# Altium PCB Recovery.PcbDoc (part 3 of 3)
Units mil, origin at the board's own origin, x right, y up, seen from the top; angles counter-clockwise.
Board outline 11025 x 3525 mil, 2 copper layers (Top Layer, Bottom Layer), stack 65.792 mil thick; 249 components, 149 nets, 729 pads, 156 vias.
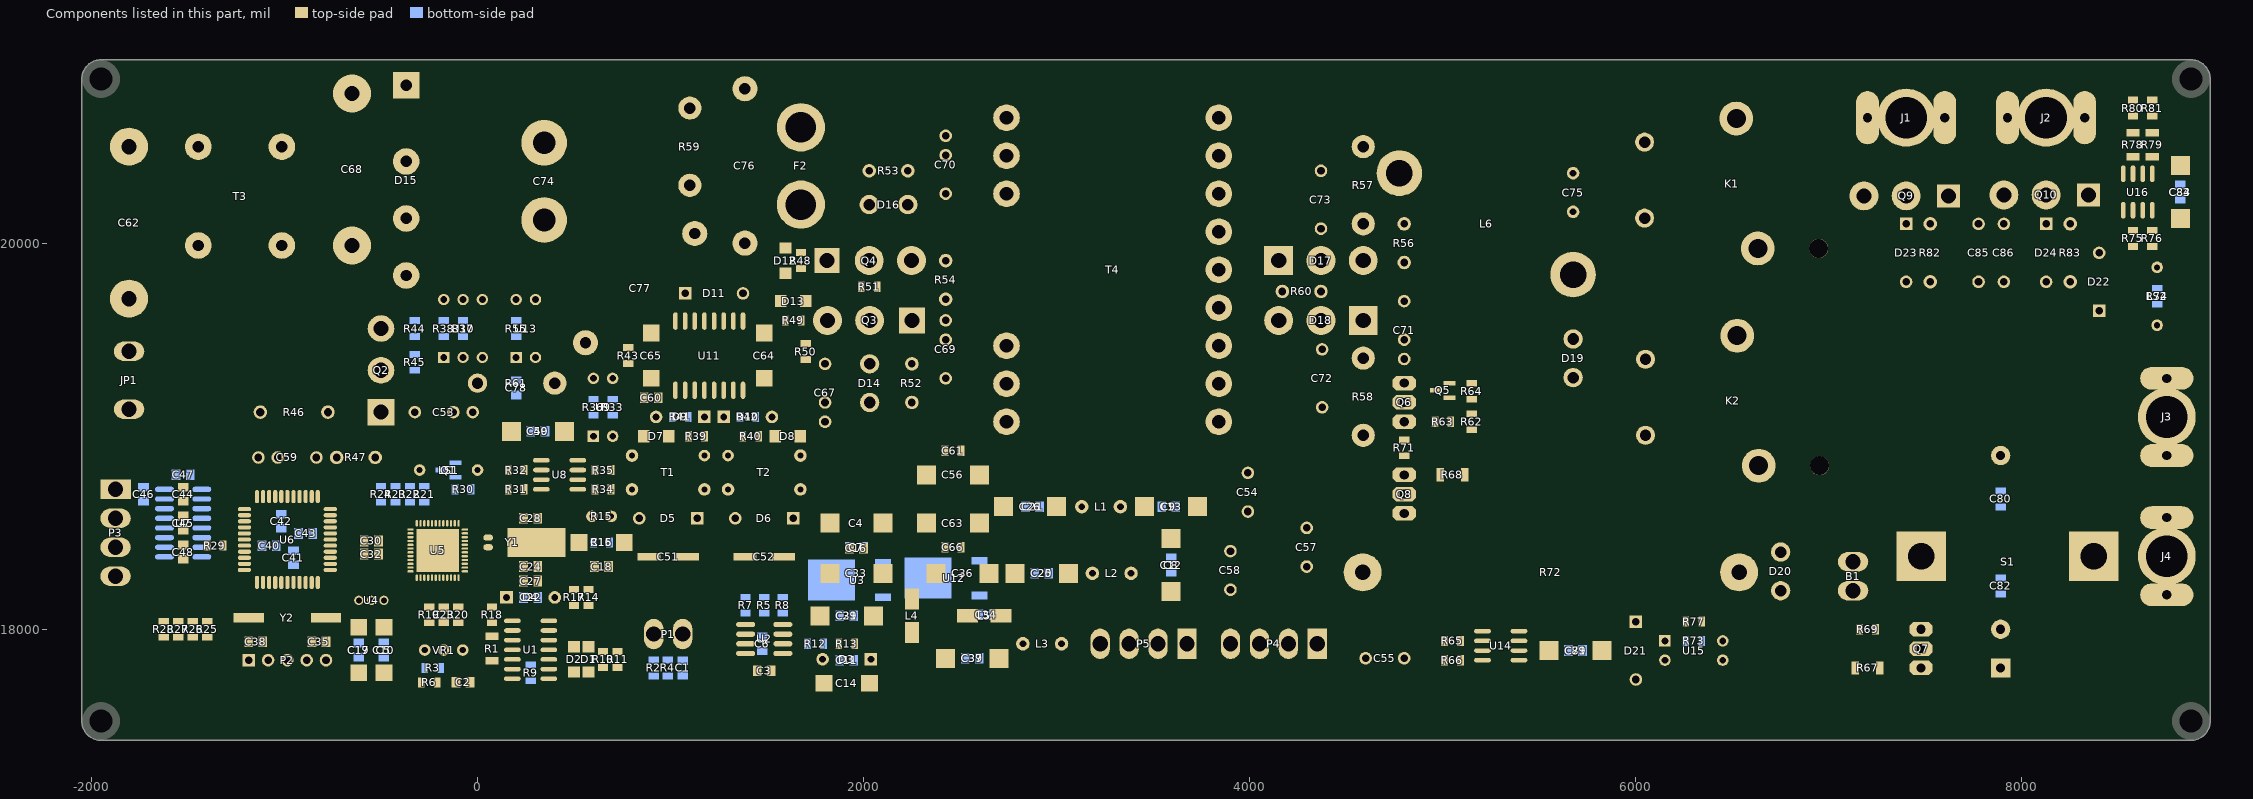
[diagram p3: the components of this part, seen from the top]

## Keep-outs
Keep-Out Layer:
  circle w5: c5446.85,18700 r125.98
  circle w5: c6830.71,17900 r125.98
  circle w5: c5446.85,19175 r125.98
  circle w5: c8126.69,19498.9 r147.64
  circle w5: c7401.69,19488.9 r147.64
  circle w5: c4368.9,18843.31 r125.98
  circle w5: c4368.9,20666.69 r125.98
  circle w5: c-1329.92,19341.54 r125.98
  circle w5: c2028.9,20666.69 r147.64
  circle w5: c2031.1,18843.31 r125.98
  lines w5: -2050,17525 ccw(c-1950,17525) -1950,17425 8875,17425 ccw(c8875,17525) 8975,17525 8975,20850 ccw(c8875,20850) 8875,20950 -1950,20950 ccw(c-1950,20850) -2050,20850 -2050,17525

## Other copper
Top Layer:
  region net GND: 2925,17555 2935,17545 3150,17545 3165,17560 3165,17610 3155,17620 3105,17620 3080,17595 2995,17595 2965,17625 2930,17625 2925,17620
Multi-Layer:
  region: 8975,20750 8775,20750 8775,20950 8875,20950 cw(c8875,20850) 8975,20850
  region: 8975,17625 8775,17625 8775,17425 8875,17425 ccw(c8875,17525) 8975,17525
  region: -2050,20750 -1850,20750 -1850,20950 -1950,20950 ccw(c-1950,20850) -2050,20850
  region: -2050,17625 -1850,17625 -1850,17425 -1950,17425 cw(c-1950,17525) -2050,17525

## Silkscreen, mask and mechanical layers (free items; w line width, h text height)
Top Overlay:
  drawing of 258 lines, arcs and shapes, not listed
  text "+ BAT -" at 865,17640 h78.74
  text "GND / PGND / +BOOTS / VBAT" at 3139.19,17615 h47.24
  text "VCC / -12V / +12V / +20V" at 3882.88,17615 h47.24
Top Solder:
  region: 7595,18190 7350,18190 7275,18265 7280,18270 7280,18795 7040,19035 7040,20010 6860,20190 6385,20190 6165,20410 6165,20565 6105,20625 4705,20625 4510,20820 3720,20820 3595,20695 3595,20185 3645,20135 3890,20135 3935,20090 3935,19640 3880,19585 3285,19585 3165,19705 3165,20850 3235,20920 6160,20920 6615,20465 7085,20465 7260,20290 7260,20045 7300,20005 7625,20005 7775,20155 7775,20300 7815,20340 7940,20340 7990,20290 7990,19965 7895,19870 7365,19870 7215,19720 7215,19370 7655,18930 7655,18250
  lines w120: 3840,20453.15 3966.85,20453.15 4150,20270 4150,19910 ; 4160,20255 4432.8,20255 4587.8,20100 4587.8,19910
Bottom Solder:
  drawing of 94 lines, arcs and shapes, not listed

## Dimensions
-2050,20850 to 8975,20850 on Keep-Out Layer
-1950,20950 to -1950,17425 on Keep-Out Layer

## Text inside footprints (layer, text, board x,y; h text height)
C54: Top Overlay "+" at 4020,18855 h60 r90
C55: Top Overlay "+" at 4555,17880 h60 r180
C57: Top Overlay "+" at 4265,18280 h60 r270
C58: Top Overlay "+" at 3870,18160 h60 r270
K1: Top Overlay "NC" at 6925,20158.7 h45; Top Overlay "NO" at 6575,20158.7 h45; Top Overlay "Com" at 6645,20698.7 h45; Top Overlay "Coil" at 6105,20383.7 h45 r270
K2: Top Overlay "NC" at 6930,19033.7 h45; Top Overlay "NO" at 6580,19033.7 h45; Top Overlay "Com" at 6650,19573.7 h45; Top Overlay "Coil" at 6110,19258.7 h45 r270
LS1: Top Overlay "+" at -330,18945 h60 r270
LS2: Top Overlay "+" at 8820,19905 h60 r180
VR1: Top Overlay "Clockwise" at -269.42,17829.07 h40; Top Overlay "CW" at -203.9,17944.06 h40; Top Overlay "TOP" at -308.95,17944.07 h40; Top Overlay "BOT" at -112.61,17944.07 h40